# Altium PCB ST-Link.PcbDoc
Units mil, origin at the board's own origin, x right, y up, seen from the top; angles counter-clockwise.
Board outline 1000 x 435 mil, 2 copper layers (Top1, Bottom2), stack 12.8 mil thick; 27 components, 33 nets, 132 pads, 53 vias.
Unrouted connection lines stored in the file: 22.
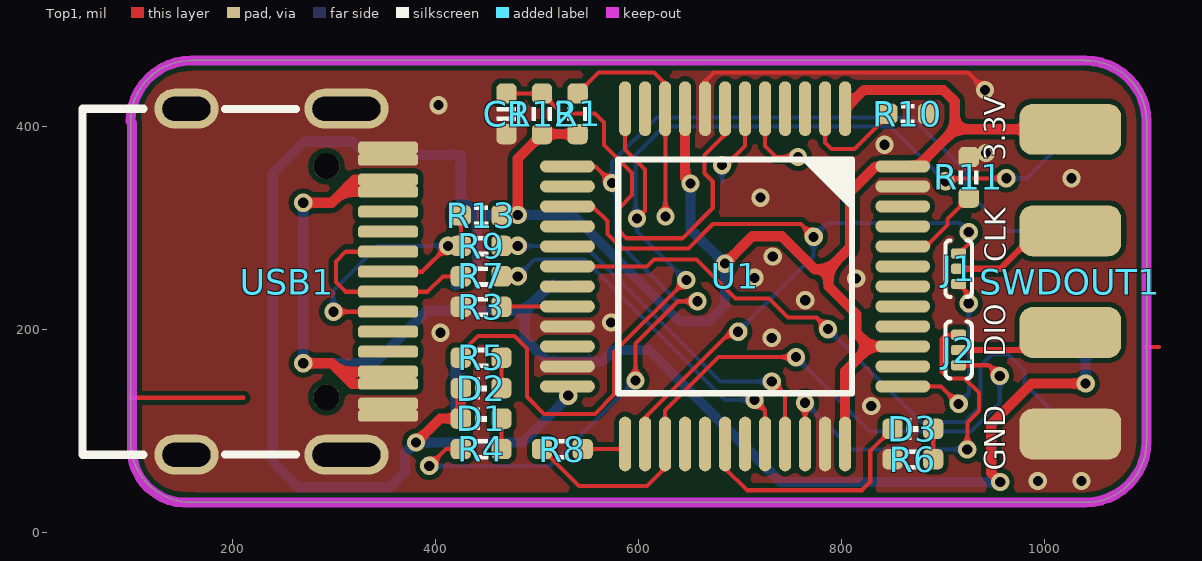
[diagram p0: Top1 view]
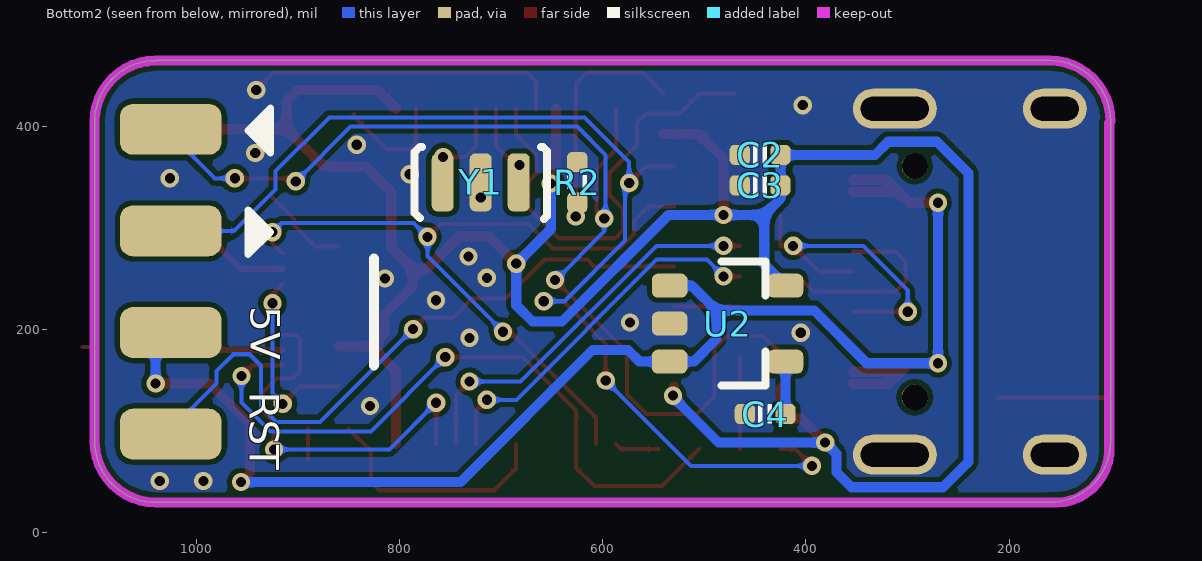
[diagram p1: Bottom2 view, seen from below]
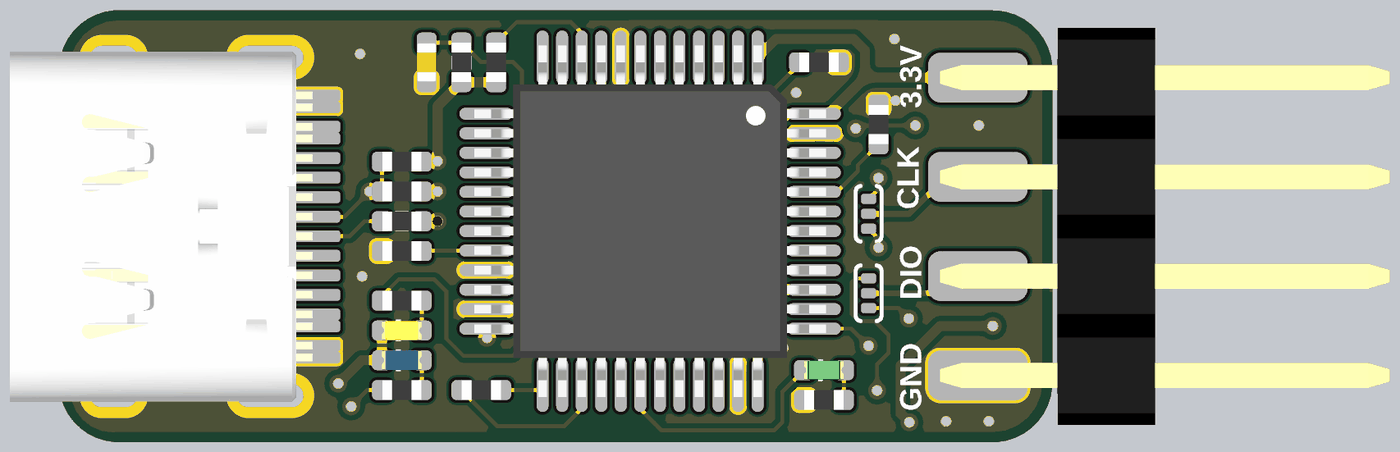
[diagram p2: 3D render of the assembled board from above, using the file's embedded part models]
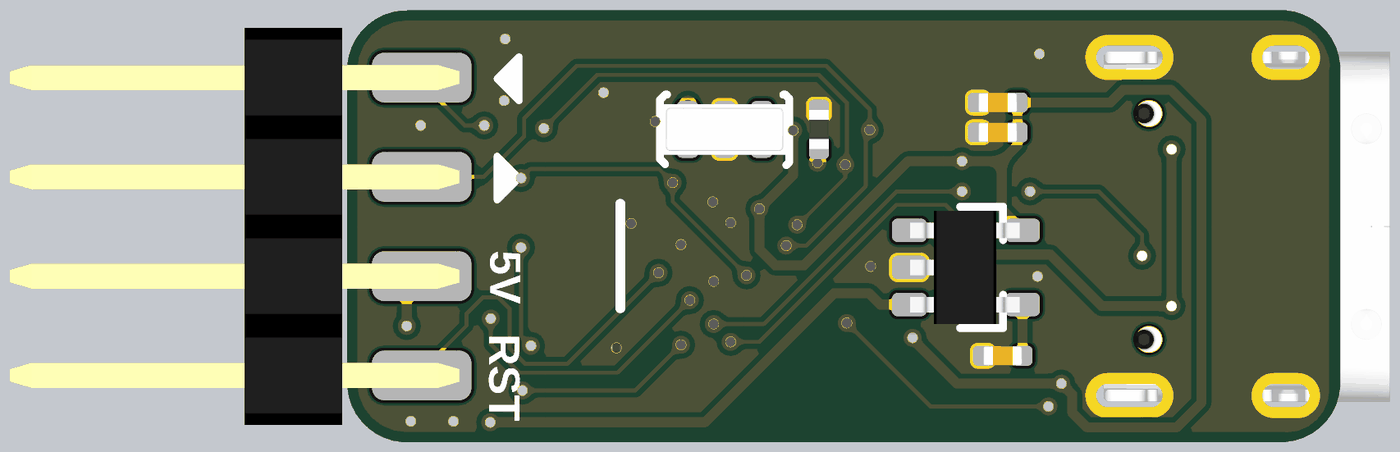
[diagram p3: 3D render of the assembled board from below, using the file's embedded part models]

## Layer stack, top to bottom
Top Solder: solder mask 0.4, Solder Resist, Dk 3.5
Top1: signal copper 1.4
Dielectric 1: core 10, FR-4, Dk 4.2
Bottom2: signal copper 1.4
Bottom Solder: solder mask 0.4, Solder Resist, Dk 3.5

## Board outline
100,90.07 ccw(c160,90.07) 160,30.07 160,30 1039.94,30 ccw(c1039.94,90) 1099.94,90 1100,90 1100,404.81 ccw(c1040,404.81) 1040,464.81 1040,465 160.02,465 ccw(c160.02,405) 100.02,405 100,405

## Design rules (kind name [scope] priority, off if disabled: settings)
Clearance [All] p1: gap=5 ignorepadtopadclearanceinfootprint=FALSE
ComponentClearance [All] p1: gap=0 collisioncheckmode=3 verticalgap=0 showdistances=FALSE
DiffPairsRouting [All] p1: maxlimit=9 minlimit=9 mostfreqgap=9 toplayer_minwidth=4 toplayer_maxwidth=4 toplayer_prefwidth=4 bottomlayer_minwidth=4 bottomlayer_maxwidth=4 bottomlayer_prefwidth=4 maxuncoupledlength=500
FanoutControl Fanout_BGA [All] p1: bgadir=Out bgaviamode=Centered fanoutstyle=Auto fanoutdirection=Alternating viagrid=1 // Fanout_BGA (Default Rule)
HoleSize [All] p1: absolutevalues=TRUE maxlimit=10000 minlimit=8 maxpercent=80.000 minpercent=20.000
MinimumSolderMaskSliver [All] p1 off: minsoldermaskwidth=2
PlaneClearance [All] p1: clearance=8
PlaneConnect [All] p1: planeconnectstyle=Direct reliefexpansion=20 reliefentries=4 reliefconductorwidth=10 reliefairgap=10
PolygonConnect [All] p1: connectstyle=Direct reliefconductorwidth=10 reliefentries=4 polygonreliefangle="90 Angle" airgapwidth=10
RoutingVias [All] p1: holewidth=8 width=16 viastyle="Through Hole" minholewidth=6 minwidth=12 maxholewidth=28 maxwidth=50
SilkToBoardRegionClearance [All] p1 off:
SilkToSilkClearance [All] p1: silktosilkclearance=0
SilkToSolderMaskClearance [IsPad] p1: minsilkscreentomaskgap=0 clearancetoexposedcopper=TRUE
SolderMaskExpansion [All] p1: expansion=3 istentingtop=FALSE
Width [All] p1: maxlimit=10000 minlimit=4 preferedwidth=4
20 further rules are at their usual default settings.

## Classes and differential pairs
net class GND: GND
differential pair USB: +USB_P -USB_N

## Components (designator, comment, footprint, x,y, rotation, side; value= is the part's Value field where it differs from the comment)
C1 "0.1uF" CAP_0402 470,412.5 r90 top value=0.1u
C2 "0.1uF" CAP_0402 445,372 r180 bottom value=0.1u
C3 "10uF" CAP_0402 445,342 r180 bottom value=0.1u
C4 "10nF" CAP_0402 440,117 r180 bottom value=0.1u
D1 "color?" LED_0402_BLUE 445,112.5 r0 top
D2 "color?" LED_0402_YELLOW 445,142.5 r0 top
D3 "color?" LED_0402_GREEN 870,102.5 r0 top
J1 "选择跳线" JUMPER-3 915,260 r270 top
J2 "选择跳线" JUMPER-3 915,180 r90 top
R1 "10K" RES_0402 540,412.5 r90 top value=22R
R2 "10K" RES_0402 625,345 r90 bottom value=22R
R3 "10K" RES_0402 445,222.5 r180 top value=22R
R4 "680R" RES_0402 445,82.5 r0 top value=22R
R5 "680R" RES_0402 445,172.5 r0 top value=22R
R6 "2K" RES_0402 870,72.5 r0 top value=22R
R7 "22R" RES_0402 445,252.5 r0 top
R8 "100R" RES_0402 525,82.5 r180 top value=22R
R9 "22R" RES_0402 445,282.5 r0 top
R10 "10K" RES_0402 865,412.5 r180 top value=22R
R11 "10K" RES_0402 925,350 r90 top value=22R
R12 "10K" RES_0402 505,412.5 r270 top value=22R
R13 "1K5" RES_0402 445,312.5 r0 top value=22R
SWDOUT1 "HDR2x4_2.54" HDR2X4_2.54_180H 1025,397.22 r0 top
U1 "STM32F103CBT6" LQFP-48 695,252.5 r270 top locked
U2 "LP2992 3V3" SOT23-5 475,206 r180 bottom
USB1 "Type-C" Type-C-TOP 254.21,247.22 r180 top
Y1 "8MHz" 晶振-3P 720,345 r0 bottom

## Footprints (in the part's own frame and the unit in brackets; to place one, negate y for a bottom-side part, rotate by r counter-clockwise, add the part's x,y. Pads: shape width x height; smd on the part's side, far side on the other; paste and mask are expansions set on the pad)
CAP_0402 [mil]
  rrect50% 20x20 smd: 1(-20,0) 2(20,0)
  silkscreen extent -7,-9 7,9, body extent -20,-10 20,10, height 20
HDR2X4_2.54_180H [mil]
  rrect50% 100x50 smd: 1(0,0) 3(0,-100) 5(0,-200) 7(0,-300)
  rrect50% 100x50 smd far side: 2(0,0) 4(0,-100) 6(0,-200) 8(0,-300)
  body extent -38,-350 415,50, height 100
JUMPER-3 [mil] "选择焊盘"
  rrect50% 10x15 smd: 1(-15,0) 2(0,0) 3(15,0)
  silkscreen extent -28,-13 28,13
LED_0402_BLUE [mil]
  rrect50% 20x20 smd: 1(-20,0) 2(20,0)
  silkscreen extent -6,-10 6,10, body extent -20,-10 20,10, height 18
LED_0402_GREEN [mil]
  rrect50% 20x20 smd: 1(-20,0) 2(20,0)
  silkscreen extent -6,-10 6,10, body extent -20,-10 20,10, height 18
LED_0402_YELLOW [mil]
  rrect50% 20x20 smd: 1(-20,0) 2(20,0)
  silkscreen extent -6,-10 6,10, body extent -20,-10 20,10, height 18
LQFP-48 [mil]
  oval 54x12 smd: 1(-165,108.27) 2(-165,88.58) 3(-165,68.9) 4(-165,49.21) 5(-165,29.53) 6(-165,9.84) 7(-165,-9.84) 8(-165,-29.53) 9(-165,-49.21) 10(-165,-68.9) 11(-165,-88.58) 12(-165,-108.27) 25(165,-108.27) 26(165,-88.58) 27(165,-68.9) 28(165,-49.21) 29(165,-29.53) 30(165,-9.84) 31(165,9.84) 32(165,29.53) 33(165,49.21) 34(165,68.9) 35(165,88.58) 36(165,108.27)
  oval 12x54 smd: 13(-108.27,-165) 14(-88.58,-165) 15(-68.9,-165) 16(-49.21,-165) 17(-29.53,-165) 18(-9.84,-165) 19(9.84,-165) 20(29.53,-165) 21(49.21,-165) 22(68.9,-165) 23(88.58,-165) 24(108.27,-165) 37(108.27,165) 38(88.58,165) 39(68.9,165) 40(49.21,165) 41(29.53,165) 42(9.84,165) 43(-9.84,165) 44(-29.53,165) 45(-49.21,165) 46(-68.9,165) 47(-88.58,165) 48(-108.27,165)
  silkscreen extent -115,-115 115,115, body extent -177,-177 177,177, height 61
RES_0402 [mil]
  rrect50% 20x20 smd: 1(-20,0) 2(20,0)
  silkscreen extent -7,-10 7,10, body extent -20,-10 20,10, height 14
SOT23-5 [mm] "SOT23, 3-Leads, Body 3.1x3.0mm (max), Pitch 0.95mm, IPC Medium Density"
  rrect50% 0.889x0.6 smd: 1(-1.5,0.95) 2(-1.5,0) 3(-1.5,-0.95) 4(1.396,-0.95) 5(1.396,0.95)
  silkscreen extent -0.2,-1.55 0.9,1.55, body extent -1.48,-1.45 1.32,1.45, height 1.2
Type-C-TOP [mm]
  round 0.65 hole 0.65: 0(-0.98,2.89) 0(-0.98,-2.89)
  oval 1.6x1 hole 0.6 slot 1.2 at 0 deg: 1(2.52,4.325) 2(2.52,-4.325)
  oval 2.1x1 hole 0.6 slot 1.7 at 0 deg: 3(-1.48,-4.325) 4(-1.48,4.325)
  rrect50% 1.5x0.3 smd: A1(-2.52,-3.35) A4(-2.52,-2.55) A5(-2.52,-1.25) A6(-2.52,-0.25) A7(-2.52,0.25) A8(-2.52,1.25) A9(-2.52,2.55) A12(-2.52,3.35) B1(-2.52,3.05) B4(-2.52,2.25) B5(-2.52,1.75) B6(-2.52,0.75) B7(-2.52,-0.75) B8(-2.52,-1.75) B9(-2.52,-2.25) B12(-2.52,-3.05)
  silkscreen extent -0.22,-4.33 5.12,4.33, body extent -2.57,-4.48 5.18,4.48, height 3.26
晶振-3P [mm] "贴片晶振"
  rrect50% 0.55x1.45 smd: 1(-0.95,0) 2(0,0) 3(0.95,0)
  silkscreen extent -1.65,-0.89 1.65,0.91, body extent -1.6,-0.89 1.65,0.89, height 0.7

## Part data
C1 C2 C3 C4: library part 电容-0402, "Capacitor"
D1 D2 D3: library part LED_0402, "LED", Type=0402
J1 J2: "Resistor", LatestRevisionDate=17-Jul-2002, LatestRevisionNote="Re-released for DXP Platform.", PackageDescription="Axial Device, Thru-Hole; 2 Leads; 0.4 in Pin Spacing", PackageReference=AXIAL-0.4, Published=8-Jun-2000, Publisher="Altium Limited"
R1 R2 R3 R4 R5 R6 R7 R8 R9 R10 R11 R12 R13: library part 电阻-0402, "Resistor"
SWDOUT1: "Header"
U1: "ARM Cortex-M3 32-bit MCU, 128 KB Flash, 20 KB Internal RAM, 37 I/Os, 48-pin LQFP, -40 to 85 degC, Tray", I/Os (High Current)=37, Operating Frequency(F) (Processor speed) (MHz)=72, Supplier Part Number 1=497-6288-ND, Supply Voltage(Vcc) min (V)=2, A/D Converter="2x12-bit (10 Channel)", ComponentLink1Description="Manufacturer URL", ComponentLink1URL=http://www.st.com/web/en/home.html, ComponentLink2Description=Datasheet, ComponentLink2URL=http://www.st.com/st-web-ui/static/active/en/resource/technical/document/datasheet/CD00161566.pdf, ComponentLink3Description="Package Specification", ComponentLink3URL=http://www.st.com/st-web-ui/static/active/en/resource/technical/document/datasheet/DM00058181.pdf, Core="ARM Cortex-M3", DatasheetVersion="Rev. 16", FLASH Size (Prog) (kB)=128, Internal RAM Size (kB)=20, Mounting Technology="Surface Mount", PackageDescription="48-Pin Low Profile Quad Flat Package, 7 x 7 mm Body, 0.5 mm Pitch", PackageReference=LQFP48, PackageVersion="Rev. 6, 06/2013", Packing=Tray, PartNumber=STM32F103CBT6, Supplier 1=Digi-Key, Supplier 2=Farnell, Supplier 3=Newark, Supplier 4=Newark, Supplier 5=Mouser, Supplier Part Number 2=1606327, Supplier Part Number 3=11N8296, Supplier Part Number 4=57P1214, Supplier Part Number 5=511-STM32F103CBT6
U2: library part LP2992, "LDO"
USB1: library part USB-Type-C-TOP
Y1: library part 晶振-3Pin, "村田贴片"

## Via types
v1: diameter 18, hole 10, Top1 to Bottom2, tented both sides, 53 vias

## Nets (pads, with @x,y where several pads share a name; then routed paths per layer and width w, separated by ;. In a path a pad name is that pad's centre, name@x,y a point inside that pad or via, vN(x,y) a via of type N, cw(c..) or ccw(c..) an arc to the next point about the centre after c; other vN are vias at no path point)
3V3: C2.2 C3.2 D1.1 D2.1 R1.1 R12.2 R13.2 SWDOUT1.1 U1.1 U1.9 U1.24 U1.36 U1.39 U1.48 U2.5 | length 2556.5
  Top1 w10: v1(381,89) 404.5,112.5 D1.1 D2.1 ; R13.2 480.5,312.5 v1(481,313) 481,368.5 R12.2 R1.1 ; U1.24 530,135.88 v1(530.79,135.09) ; U1.9 645.79,349.21 v1(651,344) ; v1(685,265) 712,292 741,292 773.48,259.52 787,259.52 ; U1.36 803.27,159.27 827.6,183.6 ; U1.1 821.77,436 900,436 911.22,424.78 911.22,397.22 ; U1.39 827.6,183.6 ; SWDOUT1.1@1030,397.22 911.22,397.22 ; 787,259.52 787,242.64 814.64,215 814.64,196.57 827.6,183.6 ; 787,259.52 808,280.52 808,335.21 833.56,360.77 U1.48 874.77,360.77 911.22,397.22
  Bottom2 w10: U2.5 441,264.35 441,313 ; v1(530.79,135.09) 530.79,133.79 486,89 v1(381,89) 370,78 370,60 355,45 265,45 240,70 240,354 271,385 319,385 332,372 C2.2 C3.2 425,329 441,313 ; v1(651,344) 651,299 v1(685,265) 685,224 669,208 640,208 535,313 v1(481,313) 441,313
5V: SWDOUT1.6 U2.1 U2.3 USB1.A4 USB1.A9 USB1.B4 USB1.B9 | length 1518.4
  Top1 w10: v1(270,167) 298,167 306.36,158.64 ; v1(270,325) 298,325 308.81,335.81 ; USB1.A9 318.17,146.83 306.36,158.64 ; USB1.B4 306.36,158.64 ; USB1.B9 308.81,335.81 ; USB1.A4 320.62,347.62 308.81,335.81 ; v1(956,50) 947.11,58.89 947.11,107.11 987,147 v1(1040,147)
  Bottom2 w10: v1(270,325) v1(270,167) 340,167 392,219 488,219 ; U2.1 512.4,243.4 488,219 ; v1(956,50) 740,50 610,180 575,180 563.6,168.6 U2.3 510.4,168.6 488,191 488,219 ; SWDOUT1.6@1030,197.22 1040,187.22 v1(1040,147)
GND: C1.1 C2.1 C3.1 C4.1 R2.2 R3.2 R6.1 R10.1 R11.2 SWDOUT1.7 U1.8 U1.21 U1.23 U1.35 U1.47 U2.2 USB1.1 USB1.2 USB1.3 USB1.4 USB1.A1 USB1.A12 USB1.B1 USB1.B12 Y1.2 | length 313.1
  Top1 w4: U1.8 665.47,444.47 674,453 924,453 v1(941,436)
  other v1: 993,51 1036,51 829,125 731,192 405,197 573,207 764,229 714,251 814.14,250.3 732,272 720,330 1026,349 790,353 942,374 842,382 403,421
JTCK: J1.1 U1.15 U1.26 | length 745.9
  Top1 w4: U1.15 554.71,321.4 569.3,306.81 569.3,294.3 583.59,280 649,280 673,304 759.67,304 v1(772.31,291.36) ; U1.26 606.42,113.42 691,198 v1(698,198) ; J1.1 925,285 v1(925,296)
  Bottom2 w4: v1(698,198) 772.31,272.31 v1(772.31,291.36) 785.96,305 916,305 v1(925,296)
JTDI: U1.17
JTDO: U1.16
JTMS: J2.1 R8.2 U1.27 | length 664.2
  Top1 w4: R8.2 541.5,46 608.18,46 626.1,63.92 U1.27 626.1,120.37 678.73,173 v1(755,173) ; J2.1 945,165 v1(955.5,154.5)
  Bottom2 w4: v1(755,173) 828,100 927,100 955.5,128.5 v1(955.5,154.5)
LED_RUN: D3.1 U1.30 | length 240.8
  Top1 w4: U1.30 685.16,63.34 706.49,42 820,42 828,50 828,80.5 D3.1
NetC1_2: C1.2 R12.1 U1.7 | length 448.7
  Top1 w4: C1.2 R12.1 524.5,413 557,413 566,404 566,381.91 593.5,354.41 593.5,332.5 580,319 580,298 588,290 643,290 673,320 673,346 665,354 665,372 685.16,392.16 U1.7
NetC4_2: C4.2 U2.4 | length 51.6
  Bottom2 w10: C4.2 U2.4
NetD1_2: D1.2 R4.2 | length 30
  Top1 w4: R4.2 D1.2
NetD2_2: D2.2 R5.2 | length 30
  Top1 w4: D2.2 R5.2
NetD3_2: D3.2 R6.2 | length 30
  Top1 w4: R6.2 D3.2
NetJ1_2: J1.2 SWDOUT1.3 | length 130.4
  Top1 w6: J1.2 956,260 993.22,297.22 SWDOUT1.3 SWDOUT1.3@1030,297.22
NetJ2_2: J2.2 SWDOUT1.5 | length 122.1
  Top1 w6: J2.2 1012.78,180 SWDOUT1.5@1030,197.22
NetR1_2: R1.2 R2.1 U1.10 | length 244.3
  Top1 w4: R1.2 560.5,453 615.37,453 626.1,442.27 U1.10 626.51,417.09 v1(626.51,311.38)
  Bottom2 w4: R2.1 626.1,323.9 626.1,311.79 v1(626.51,311.38)
NetR3_1: R3.1 U1.20 | length 64.5
  Top1 w4: R3.1@465.47,222.97 U1.20
NetR7_2: R7.2 U1.32 | length 360.9
  Top1 w4: R7.2 v1(481,252.5) ; v1(714,131) 724.53,120.47 U1.32
  Bottom2 w4: v1(481,252.5) 497.5,269 547,269 685,131 v1(714,131)
NetR8_1: R8.1 U1.25 | length 43.8
  Top1 w4: R8.1 581.73,82.5 U1.25
NetR9_2: R9.2 U1.33 | length 388.3
  Top1 w4: R9.2 v1(481,282.5) ; v1(731,149) 744.21,135.79 U1.33
  Bottom2 w4: v1(481,282.5) 547.17,282.5 680.67,149 v1(731,149)
NetR10_2: R10.2 U1.2 | length 112.6
  Top1 w4: U1.2 783.58,384.47 790.03,378.02 812.62,378.02 845,410.41 R10.2
NetR11_1: R11.1 U1.44 | length 88.4
  Top1 w4: U1.44 883.07,282.03 904,302.96 904,309 R11.1
NetU1_5: U1.5 Y1.3 | length 73.7
  Top1 w4: U1.5 724.53,380.79 735.32,370 v1(757,370)
NetU1_6: U1.6 Y1.1 | length 84.6
  Top1 w4: v1(682,362) 686,362 704.84,380.84 U1.6
  Bottom2 w4: v1(682,362) 682,345.6 Y1.1
nRST: SWDOUT1.8 U1.18 | length 674.8
  Top1 w4: U1.18 608.34,262.34 615,269 657,269 695.5,230.5 728.5,230.5 747,212 ; 762,212 747,212 ; v1(786.52,200.58) 775.1,212 747,212
  Bottom2 w4: v1(786.52,200.58) 878.1,109 921,109 936.45,124.45 936.45,164.52 947.78,175.85 963.38,175.85 980,159.23 980,147.22 SWDOUT1.8@1030,97.22
RENUMn: U1.38
RX: R4.1 SWDOUT1.4 U1.13 | length 1150.6
  Top1 w4: v1(394,66) 410.5,82.5 R4.1 ; U1.13 557.61,360.77 v1(573.88,344.49) ; v1(597,150) 597,186.27 638.73,228 v1(658,228)
  Bottom2 w4: v1(394,66) 513,66 v1(597,150) ; v1(658,228) 637.72,228 578,287.72 578,340.37 v1(573.88,344.49) 573.88,364.88 618,409 869,409 921.82,356.18 921.82,338.18 962.78,297.22 980.78,297.22 SWDOUT1.4
ST_SWCLK: J1.3 U1.37 | length 188.4
  Top1 w4: U1.37 897.77,144.23 v1(915,127) ; J1.3 925,235 v1(925,226)
  Bottom2 w4: v1(915,127) 925,137 v1(925,226)
ST_SWDIO: J2.3 U1.34 | length 376.4
  Top1 w4: U1.34 v1(763.9,128.1) ; J2.3 902,195 898,191 898,159 905,152 921,152 935,138 935,120 923.52,108.52 v1(923.52,82.04)
  Bottom2 w4: v1(763.9,128.1) 809.96,82.04 v1(923.52,82.04)
T_SWO: U1.31
TX: R5.1 SWDOUT1.2 U1.12 | length 1124.3
  Top1 w4: R5.1 425,177 442,194 477.68,194 490,181.68 490,134 507,117 557,117 576,136 576,178 v1(647,249) ; U1.12 586.73,377.27 606.11,357.89 606.11,317.11 v1(598.5,309.5) ; v1(902,346) 905,349 v1(962,349)
  Bottom2 w4: v1(647,249) 646,249 598.5,296.5 v1(598.5,309.5) 597,311 597,372 625,400 848,400 v1(902,346) ; v1(962,349) 981.78,349 SWDOUT1.2@1030,397.22
USB_N: R7.1 USB1.A7 USB1.B7 | length 208.7
  Top1 w4: USB1.B7 311.75,276.75 302,267 302,247 311.62,237.38 USB1.A7 392.38,237.38 407.5,252.5 R7.1
USB_P: R9.1 R13.1 USB1.A6 USB1.B6 | length 317.8
  Top1 w4: v1(299.7,217.7) USB1.B6 ; USB1.A6 387.07,257.07 v1(412.5,282.5) R9.1 R13.1
  Bottom2 w4: v1(299.7,217.7) 299.7,238.7 343.5,282.5 v1(412.5,282.5)
pads on no net: U1.3 U1.4 U1.11 U1.14 U1.19 U1.22 U1.28 U1.29 U1.40 U1.41 U1.42 U1.43 U1.45 U1.46 USB1.0 USB1.A5 USB1.A8 USB1.B5 USB1.B8
copper on no net: | length 124
  Top1 w4: 100,133 211,133 ; 1099,183 1112,183

## Polygon pours and split planes (outlines as drawn)
GND on Bottom2 "GND_L02_P000" (solid, remove dead copper, pour order 0): 100,465 1100,465 1100,30 100,30
GND on Top1 "GND_L01_P001" (solid, remove dead copper, pour order 1): 100,465 1100,465 1100,30 100,30

## Keep-outs
Keep-Out Layer:
  lines w10: 100,405 cw(c160.01,404.99) 160.02,465 1040,465 ; 101.45,403.55 101.45,76.95 ccw(c154.16,82.78) 160,30.07 ; 160,30 1039.94,30 ccw(c1039.97,90.03) 1100,90 1100,404.81 ccw(c1040,404.81) 1040,464.81

## Silkscreen, mask and mechanical layers (free items; w line width, h text height)
Top Overlay:
  text "3.3V" at 968,366.41 h35 r90
  text "CLK" at 968.42,266.41 h35 r90
  text "DIO" at 968,173.41 h35 r90
  text "GND" at 968,61.41 h35 r90
Bottom Overlay:
  region: 927,418 927,374 949,396
  region: 949,274 949,318 927,296
  lines w7: 927,296 949,274 949,318 927,296 ; 927,374 949,396 927,418 927,374
  lines w10: 825,165 825,270
  text "5V" at 956,223 h50 r90
  text "RST" at 957,139 h50 r90
  text "PENGZHIHUI.XYZ" at -7135.87,-4455.38 h50
  text "ST-Link" at -7135.87,-4455.38 h70
  text "Nano" at -7135.87,-4455.38 h50
  text "USB" at -7135.87,-4455.38 h100 r90
Mechanical 1:
  lines w10: 100,405 100,90.07 ccw(c160,90.07) 160,30.07 ; 100.02,405 cw(c160.02,405) 160.02,465 1040,465 ; 160,30 1039.94,30 ccw(c1039.94,90) 1099.94,90 ; 1040,464.81 cw(c1040,404.81) 1100,404.81 1100,90
Drill Drawing:
  circle w10: c150.62,1312.28 r33.33
  lines w10: 117.29,978.94 183.96,978.94 183.96,1045.61 117.29,1045.61 117.29,978.94 ; 117.29,1145.61 133.96,1145.61 150.62,1128.94 167.29,1145.61 183.96,1145.61 167.29,1162.28 183.96,1178.94 167.29,1178.94 150.62,1195.61 133.96,1178.94 117.29,1178.94 133.96,1162.28 117.29,1145.61 ; 117.29,1495.61 183.96,1495.61 150.62,1428.94 117.29,1495.61
  lines w15: 57.5,933.94 13215.81,933.94 ; 57.5,1533.94 13215.81,1533.94 ; 608.38,783.94 608.38,1683.94 ; 1148.24,783.94 1148.24,1683.94 ; 2247.92,783.94 2247.92,1683.94 ; 2753.79,783.94 2753.79,1683.94 ; 3487.59,783.94 3487.59,1683.94 ; 4677.25,783.94 4677.25,1683.94 ; 5267.1,783.94 5267.1,1683.94 ; 6012.9,783.94 6012.9,1683.94 ; 7202.55,783.94 7202.55,1683.94 ; 8056.31,783.94 8056.31,1683.94 ; 9389.92,783.94 9389.92,1683.94 ; 10723.52,783.94 10723.52,1683.94 ; 11813.21,783.94 11813.21,1683.94 ; 57.5,783.94 13215.81,783.94 13215.81,1683.94 57.5,1683.94 57.5,783.94
  text "Symbol" at 147.5,1578.94 h72
  text "Count" at 653.38,1578.94 h72
  text "Hole Size" at 1193.24,1578.94 h72
  text "Plated" at 2292.92,1578.94 h72
  text "Hole Type" at 2798.79,1578.94 h72
  text "Drill Layer Pair" at 3532.59,1578.94 h72
  text "Via/Pad" at 4722.25,1578.94 h72
  text "Pad Shape" at 5312.1,1578.94 h72
  text "Template" at 6057.9,1578.94 h72
  text "Description" at 7247.55,1578.94 h72
  text "Hole Tolerance (+)" at 8101.31,1578.94 h72
  text "Hole Tolerance (-)" at 9434.92,1578.94 h72
  text "Hole Length" at 10768.52,1578.94 h72
  text "Routed Path Length" at 11858.21,1578.94 h72
  text "2" at 653.38,1428.94 h60
  text "23.62mil (0.600mm)" at 1193.24,1428.94 h60
  text "PTH" at 2292.92,1428.94 h60
  text "Slot" at 2798.79,1428.94 h60
  text "Top1 - Bottom2" at 3532.59,1428.94 h60
  text "Pad" at 4722.25,1428.94 h60
  text "Rounded" at 5312.1,1428.94 h60
  text "r160_100h60_120r100" at 6057.9,1428.94 h60
  text "47.24mil (1.200mm)" at 10768.52,1428.94 h60
  text "23.62mil (0.600mm)" at 11858.21,1428.94 h60
  text "2" at 653.38,1278.94 h60
  text "23.62mil (0.600mm)" at 1193.24,1278.94 h60
  text "PTH" at 2292.92,1278.94 h60
  text "Slot" at 2798.79,1278.94 h60
  text "Top1 - Bottom2" at 3532.59,1278.94 h60
  text "Pad" at 4722.25,1278.94 h60
  text "Rounded" at 5312.1,1278.94 h60
  text "r210_100h60_170r100" at 6057.9,1278.94 h60
  text "66.93mil (1.700mm)" at 10768.52,1278.94 h60
  text "43.31mil (1.100mm)" at 11858.21,1278.94 h60
  text "2" at 653.38,1128.94 h60
  text "25.59mil (0.650mm)" at 1193.24,1128.94 h60
  text "PTH" at 2292.92,1128.94 h60
  text "Round" at 2798.79,1128.94 h60
  text "Top1 - Bottom2" at 3532.59,1128.94 h60
  text "Pad" at 4722.25,1128.94 h60
  text "Rounded" at 5312.1,1128.94 h60
  text "c65h65" at 6057.9,1128.94 h60
  text "-" at 10768.52,1128.94 h60
  text "-" at 11858.21,1128.94 h60
  text "53" at 653.38,978.94 h60
  text "10.00mil (0.254mm)" at 1193.24,978.94 h60
  text "PTH" at 2292.92,978.94 h60
  text "Round" at 2798.79,978.94 h60
  text "Top1 - Bottom2" at 3532.59,978.94 h60
  text "Via" at 4722.25,978.94 h60
  text "Rounded" at 5312.1,978.94 h60
  text "v46h25m0mx0" at 6057.9,978.94 h60
  text "-" at 10768.52,978.94 h60
  text "-" at 11858.21,978.94 h60
  text "59 Total" at 653.38,828.94 h60
  text "Slot definitions :" at 147.5,683.97 h60
  text "Routed Path Length" at 1180.19,683.97 h60
  text "= Calculated from tool start centre position to tool end centre position." at 2282.86,683.97 h60
  text "Hole Length" at 1180.19,583.99 h60
  text "= Routed Path Length + Tool Size = Slot length as defined in the PCB layout" at 1872.99,583.99 h60